# EAGLE board nor gate (EAGLE 9.7.0)

Size 98.61 x 55.29 mm. Coordinates in mm from the lower left corner, seen from the top.
Outline: 0,0 98.61,0 98.61,55.29 0,55.29 0,0
Copper layers (1*16): Top 0.035mm / dielectric 1.5mm / Bottom 0.035mm
Design rules "default": minimum track width 6mil, minimum drill 0.35mm, track to track 6mil, track to pad 6mil, pad to pad 6mil, via to via 6mil, smd to smd 6mil, copper to edge 40mil, drill to drill 6mil, minimum pad ring 10mil, minimum via ring 8mil, stop-mask expansion 4mil, vias tented up to drill 0mil, thermal gap 10mil

## Footprints (pad centres in the part's own frame; a part is rotated, then mirrored left to right if it is on the bottom)
LEDRD254W60D565H860B = drill 0.981 pad 1.581: 1 -1.27,0; 2 1.27,0
BATTERY-GENERIC = drill 1.118 pad 3.15 octagon: + 2.54,0; - -2.54,0
RESAD1016W63L850D250B = drill 0.83 pad 1.43: 1 -5.08,0; 2 5.08,0
SWITCH-SPDT-PTH-8.5X3.7MM = drill 1.016 pad 1.88: 1 -2.54,0; 2 0,0; 3 2.54,0
DIP762W53P254L1969H508Q14B = drill 0.743 pad 1.343: 1 -3.81,7.62; 2 -3.81,5.08; 3 -3.81,2.54; 4 -3.81,0; 5 -3.81,-2.54; 6 -3.81,-5.08; 7 -3.81,-7.62; 8 3.81,-7.62; 9 3.81,-5.08; 10 3.81,-2.54; 11 3.81,0; 12 3.81,2.54; 13 3.81,5.08; 14 3.81,7.62

## Placement (x,y rotation side)
D1  RED  [LEDRD254W60D565H860B]  91.01,22.23 180 top
P1  BATTERYGENERIC  [BATTERY-GENERIC]  8.26,47.03 180 top
R1  100  [RESAD1016W63L850D250B]  92.28,14.61 90 top
S1  TOGGLE  [SWITCH-SPDT-PTH-8.5X3.7MM]  54.18,24.77 0 top
S2  TOGGLE  [SWITCH-SPDT-PTH-8.5X3.7MM]  64.34,6.99 0 top
U1  74HC02_PDIP  [DIP762W53P254L1969H508Q14B]  77.04,15.88 90 top

## Library data of the parts
D1 = Tinkercad; CATEGORY: Opto-Electronic; SUB-CATEGORY: LED; VALUE: LED_RED
P1 R1 S1 S2 U1 = Tinkercad

## Nets
D1_A: D1.1 R1.2
P1+: P1.+ S1.1 S2.1 U1.14
P1-: D1.2 P1.- S1.3 S2.3
U1_1A: S1.2 U1.2
U1_1B: S2.2 U1.3
U1_1Y: R1.1 U1.1

## Tracks (layer width: path | path; a pad name or v marks a point on that pad's centre or on a via)
D1_A  (1 unrouted)
P1+  (3 unrouted)
P1-  (3 unrouted)
U1_1A  (1 unrouted)
U1_1B  (1 unrouted)
U1_1Y  (1 unrouted)